# Altium PCB qi_adapter.PcbDoc
Units mil, origin at the board's own origin, x right, y up, seen from the top; angles counter-clockwise.
Board outline 305 x 635 mil, 2 copper layers (Top Layer, Bottom Layer); 21 components, 15 nets, 76 pads, 13 vias.
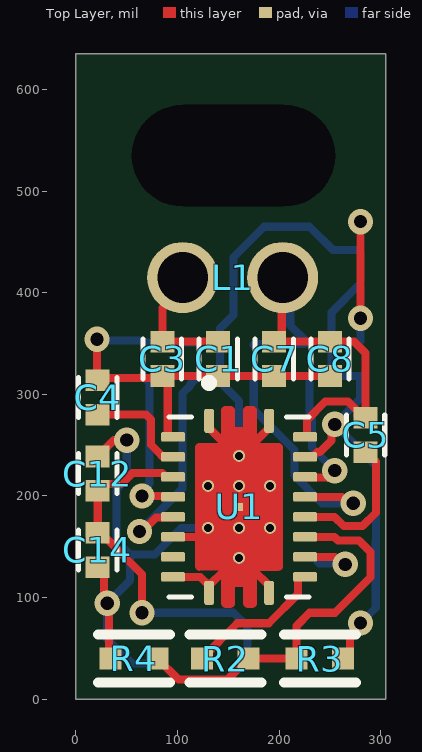
[diagram p0: Top Layer view]
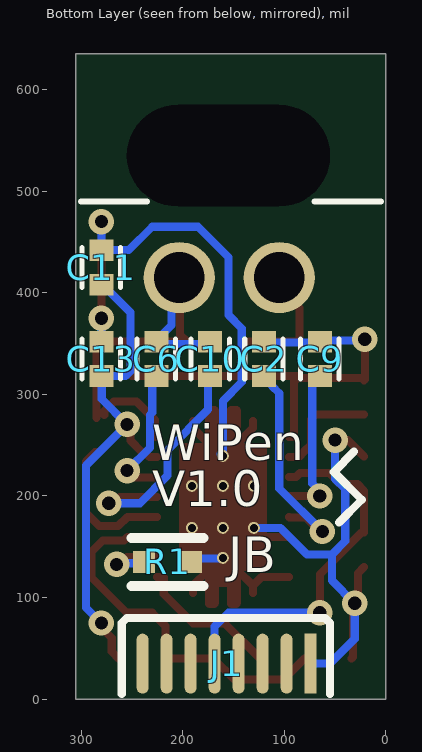
[diagram p1: Bottom Layer view, seen from below]

## Layer stack, top to bottom
Top Solder: solder mask 0.4, Solder Resist, Dk 3.5
Top Layer: signal copper 1.4
Dielectric 1: dielectric 12.6, FR-4, Dk 4.8
Bottom Layer: signal copper 1.4
Bottom Solder: solder mask 0.4, Solder Resist, Dk 3.5

## Board outline
0,0 305,0 305,635 0,635

## Design rules (kind name [scope] priority, off if disabled: settings)
Clearance [All] p1: gap=6 ignorepadtopadclearanceinfootprint=TRUE
MinimumSolderMaskSliver [All] p1: minsoldermaskwidth=6
PolygonConnect [All] p1: connectstyle=Relief reliefconductorwidth=10 reliefentries=4 polygonreliefangle="90 Angle" airgapwidth=10
RoutingVias [All] p1: holewidth=13 width=25 viastyle="Through Hole" minholewidth=13 minwidth=25 maxholewidth=13 maxwidth=25
SilkToSilkClearance [All] p1: silktosilkclearance=6
SilkToSolderMaskClearance [IsPad] p1: minsilkscreentomaskgap=6 clearancetoexposedcopper=TRUE
SolderMaskExpansion [All] p1: expansion=4
Width [All] p1: maxlimit=8 minlimit=8 preferedwidth=8
27 further rules are at their usual default settings.

## Components (designator, comment, footprint, x,y, rotation, side; value= is the part's Value field where it differs from the comment)
C1 "0.22 uF" SMD-0402-CAP 140,335 r270 top
C2 "22 nF" SMD-0402-CAP 120,335 r270 bottom
C3 "22 nF" SMD-0402-CAP 85,335 r270 top
C4 "10 nF" SMD-0402-CAP 21.4,296.93 r270 top
C5 "22 nF" SMD-0402-CAP 285,260 r270 top
C6 "10 nF" SMD-0402-CAP 226,335 r270 bottom
C7 "3300 pF" SMD-0402-CAP 195,335 r90 top
C8 "270 pF" SMD-0402-CAP 250,335 r90 top
C9 "0.47 uF" SMD-0402-CAP 65,335 r270 bottom
C10 "0.47 uF" SMD-0402-CAP 173,335 r270 bottom
C11 "4.7 uF" SMD-0402-CAP 280,425 r270 bottom
C12 "1 uF" SMD-0402-CAP 21.4,221.93 r90 top
C13 "0.1 uF" SMD-0402-CAP 280,335 r270 bottom
C14 "0.1 uF" SMD-0402-CAP 21.4,146.93 r270 top
J1 "Lightning Socket" "LIGHTNING CONNECTOR" 239.49,35 r180 bottom
L1 "Wireless Coil" "QI COIL" 105,415 r0 top
R1 "10k" SMD-0402-RES 215,135 r270 bottom
R2 "270R" SMD-0402-RES 147,40 r90 top
R3 "20k" SMD-0402-RES 240,40 r90 top
R4 "196R" SMD-0402-RES 57,40 r270 top
U1 "BQ51013BRHLT" IC_BQ51013BRHLT 160.47,189.24 r0 top

## Footprints (in the part's own frame and the unit in brackets; to place one, negate y for a bottom-side part, rotate by r counter-clockwise, add the part's x,y. Pads: shape width x height; smd on the part's side, far side on the other; paste and mask are expansions set on the pad)
IC_BQ51013BRHLT [mm]
  rrect40% 0.24x0.6 smd mask+0: 1(-0.75,2.15) 10(-0.75,-2.15) 11(0.75,-2.15) 20(0.75,2.15)
  rrect40% 0.6x0.24 smd mask+0: 2(-1.65,1.75) 3(-1.65,1.25) 4(-1.65,0.75) 5(-1.65,0.25) 6(-1.65,-0.25) 7(-1.65,-0.75) 8(-1.65,-1.25) 9(-1.65,-1.75) 12(1.65,-1.75) 13(1.65,-1.25) 14(1.65,-0.75) 15(1.65,-0.25) 16(1.65,0.25) 17(1.65,0.75) 18(1.65,1.25) 19(1.65,1.75)
  rect 0.2x0.2 smd paste-1 mask+0: 21(0,0)
  round 0.3 hole 0.2 mask+0: 22(0,1.275) 23(-0.775,0.525) 24(0,0.525) 25(0.775,0.525) 26(-0.775,-0.525) 27(0,-0.525) 28(0.775,-0.525) 29(0,-1.275)
  Top Layer region: 381 vertices and 0 holes, not listed, extent -1.095,-2.52 1.095,2.52
  silkscreen extent -1.75,-2.25 1.75,3.2, body extent -1.65,-2.16 1.65,2.16, height 0.25
"LIGHTNING CONNECTOR" [mm]
  rect 0.3x1.5 smd: 1(4.2,0)
  oval 0.3x1.5 smd: 2(3.6,0) 3(3,0) 4(2.4,0) 5(1.8,0) 6(1.2,0) 7(0.6,0) 8(0,0)
"QI COIL" [mil] "Wireless Coil"
  round 70 hole 50: 1(0,0) 2(98.43,0)
  body extent -51,50 149,250, height 50
SMD-0402-CAP [mm]
  rect 0.54x0.6 smd: 1(-0.43,0) 2(0.43,0)
  silkscreen extent -0.5,-0.48 0.5,0.48
SMD-0402-RES [mm]
  rect 0.55x0.55 smd: 1(0,0.584) 2(0,-0.584)
  silkscreen extent -0.6,-0.9 0.6,0.9, body extent -0.27,-0.57 0.28,0.58, height 0.41

## Part data
C1: library part "0.22 uF 0402", "0.22µF ±10% 25V Ceramic Capacitor X5R 0402", Package=0402, Availability=Available, Digikey Part=490-12265-1-ND, Link=https://www.digikey.ca/product-detail/en/murata-electronics/GRT155R61E224KE01D/490-12265-1-ND/5416966, MF="Murata Electronics", MP=GRT155R61E224KE01D, Price=0.16
C2 C3 C5: library part "22nF 0402", "0.022µF -20%, +80% 25V Ceramic Capacitor Y5V (F) 0402", Package=0402, Availability=Available, Digikey Part=311-3823-1-ND, Link=https://www.digikey.ca/product-detail/en/yageo/CC0402ZRY5V8BB223/311-3823-1-ND/8024912, MF=Yageo, MP=CC0402ZRY5V8BB223, Price=0.16
C4 C6: library part "10nF 0402", "10000pF ±10% 25V Ceramic Capacitor X7R 0402", Package=0402, Availability=Available, Digikey Part=399-1278-1-ND, Link=https://www.digikey.ca/product-detail/en/kemet/C0402C103K3RACTU/399-1278-1-ND/416054, MF=KEMET, MP=C0402C103K3RACTU, Price=0.16
C7: library part "3300 pF 0402", "3300pF ±10% 25V Ceramic Capacitor X7R 0402", Package=0402, Availability=Available, Digikey Part=732-7542-1-ND, Link=https://www.digikey.ca/product-detail/en/w%C3%BCrth-elektronik/885012205047/732-7542-1-ND/5454169, MF="Würth Elektronik", MP=885012205047, Price=0.16
C8: library part "270 pF 0402", "270pF ±5% 25V Ceramic Capacitor C0G, NP0 040", Package=0402, Availability=Available, Digikey Part=399-15315-1-ND, Link=https://www.digikey.ca/product-detail/en/kemet/C0402C271J3GAC7867/399-15315-1-ND/7386713, MF=KEMET, MP=C0402C271J3GAC7867, Price=0.16
C9 C10: library part "0.47uF 0402", "0.47µF ±10% 25V Ceramic Capacitor X5R 0402", Package=0402, Availability=Available, Digikey Part=490-12269-1-ND, Link=https://www.digikey.ca/product-detail/en/murata-electronics/GRT155R61E474KE01D/490-12269-1-ND/5416970, MF="Murata Electronics", MP=GRT155R61E474KE01D, Price=0.19
C11: library part "4.7uF 0402", "4.7µF ±20% 16V Ceramic Capacitor X5R 0402", Package=0402, Availability=Available, Digikey Part=478-10788-1-ND, Link=https://www.digikey.ca/product-detail/en/avx-corporation/0402YD475MAT2A/478-10788-1-ND/7536324, MF="AVX Corporation", MP=0402YD475MAT2A, Price=0.52
C12: library part "1uF 0402", "1µF ±10% 16V Ceramic Capacitor X5R 0402", Package=0402, Availability=Available, Digikey Part=1276-1067-1-ND, Link=https://www.digikey.ca/product-detail/en/samsung-electro-mechanics/CL05A105KO5NNNC/1276-1067-1-ND/3889153, MF="Samsung Electro-Mechanics", MP=CL05A105KO5NNNC, Price=0.16
C13 C14: library part "0.1uF 0402", "0.1µF -20%, +80% 16V Ceramic Capacitor Y5V (F) 0402", Package=0402, Availability=Available, Digikey Part=1276-1004-1-ND, Link=https://www.digikey.ca/product-detail/en/samsung-electro-mechanics/CL05F104ZO5NNNC/1276-1004-1-ND/3889090, MF="Samsung Electro-Mechanics", MP=CL05F104ZO5NNNC, Price=0.16
J1: "Female Lightning Socket"
L1: "Qi Compatible Wireless Receiver Coil", ComponentLink1Description="Digikey Link", ComponentLink1URL=https://www.digikey.ca/products/en/inductors-coils-chokes/wireless-charging-coils/75?k=wireless+coil&k=&pkeyword=wireless+coil&sv=0&pv46=15578&sf=1&FV=-8%7C75&quantity=&ColumnSort=0&page=1&pageSize=25
R1: library part "10K 0402", "10 kOhms ±5% 0.063W, 1/16W Chip Resistor 0402 Moisture Resistant Thick Film", Digi-Key Part Number=311-10KJRCT-ND, Manufacturer=Yageo, Package / Case=0402, Part Number=RC0402JR-0710KL, Tolerance=±5%, Link=https://www.digikey.ca/product-detail/en/yageo/RC0402JR-0710KL/311-10KJRCT-ND/729365, Price=0.17, Supplier Device Package=0402
R2: library part "274R 0402", "274 Ohms ±1% 0.1W, 1/10W Chip Resistor 0402", Digi-Key Part Number=P274LCT-ND, Manufacturer="Panasonic Electronic Components", Package / Case=0402, Part Number=ERJ-2RKF2740X, Tolerance=±1%, Link=https://www.digikey.ca/product-detail/en/panasonic-electronic-components/ERJ-2RKF2740X/P274LCT-ND/194305, Price=.16, Supplier Device Package=0402
R3: library part "20K 0402", "20 kOhms ±1% 0.1W, 1/10W Chip Resistor 0402", Digi-Key Part Number=P20.0KLCT-ND, Manufacturer="Panasonic Electronic Components", Package / Case=0402, Part Number=ERJ-2RKF2002X, Tolerance=±1%, Link=https://www.digikey.ca/product-detail/en/panasonic-electronic-components/ERJ-2RKF2002X/P20-0KLCT-ND/194250, Price=.16, Supplier Device Package=0402
R4: library part "196R 0402", "196 Ohms ±1% 0.1W, 1/10W Chip Resistor 0402", Digi-Key Part Number=P196LCT-ND, Manufacturer="Panasonic Electronic Components", Package / Case=0402, Part Number=ERJ-2RKF1960X, Tolerance=±1%, Link=https://www.digikey.ca/product-detail/en/panasonic-electronic-components/ERJ-2RKF1960X/P196LCT-ND/194231, Price=.16, Supplier Device Package=0402
U1: "Wireless Power Receiver PMIC 20-VQFN _3.5x4.5_", Package="VQFN-20 Texas Instruments", Digi-Key_Part_Number=296-35638-1-ND, Digi-Key_Purchase_URL=https://www.digikey.com/product-detail/en/texas-instruments/BQ51013BRHLT/296-35638-1-ND/3877679?utm_source=snapeda&utm_medium=aggregator&utm_campaign=symbol, MF="Texas Instruments", MP=BQ51013BRHLT, SnapEDA_Link=https://www.snapeda.com/parts/BQ51013BRHLT/Texas%20Instruments/view-part/46178/?ref=snap

## Free pads (board coordinates)
  round 60 hole 100 slot 200 at 0 deg unplated: 2(155,535)

## Via types
v1: diameter 25, hole 13, Top Layer to Bottom Layer, tented both sides, 13 vias

## Nets (pads, with @x,y where several pads share a name; then routed paths per layer and width w, separated by ;. In a path a pad name is that pad's centre, name@x,y a point inside that pad or via, vN(x,y) a via of type N, cw(c..) or ccw(c..) an arc to the next point about the centre after c; other vN are vias at no path point)
GND: C11.1 C12.2 C13.1 C14.2 J1.1 R1.1 R4.2 U1.1 U1.7 U1.9 U1.10 U1.11 U1.20 U1.21 U1.22 U1.23 U1.24 U1.25 U1.26 U1.27 U1.28 U1.29 | length 1300.2
  Top Layer w8: C14.2 27.45,123.95 27.45,97.55 v1(30.7,94.3) 32.35,92.65 32.35,41.65 R4.2 ; C12.2 37.54,255 v1(50,255) ; U1.9 122.28,120.34 U1.10@130.94,111.68 ; U1.7 120.07,159.71 128.93,168.57 U1.26 ; U1.10 U1.10@130.94,111.68 ; U1.1 130.94,266.8 145.65,252.09 147.81,252.09 U1.22 161.2,240.16 163.37,240.16 190,266.8 U1.20 ; U1.11 190,111.68 175.3,126.38 173.13,126.38 U1.29 147.81,126.38 145.65,126.38 U1.10@130.94,111.68 ; v1@275,380 v1(280,375) v1(280,470)
  Bottom Layer w8: v1(50,255) 50,216.82 40,206.82 40,155.68 53.18,142.5 ; J1.1 55,35 30.7,59.3 v1(30.7,94.3) 53.18,116.78 53.18,142.5 ; U1.26 103.57,168.57 77.5,142.5 53.18,142.5 ; U1.29 161.2,138.31 188.69,138.31 R1.1 ; U1.22@162.5,241.46 U1.22 160.47,293.4 141.81,312.06 141.81,365 155,378.19 155,435 185,465 230,465 253.07,441.93 C11.1 v1(280,470) ; C13.1 v1(280,375)
NetC1_1: C1.1 C3.1 L1.1 | length 139.1
  Top Layer w8: L1.1@111.57,425 111.57,411.68 85,385.11 C3.1 C1.1
NetC1_2: C1.2 C2.1 C3.2 C4.1 C7.1 C8.1 C9.1 U1.2 | length 439.3
  Top Layer w8: v1(20.7,354.3) 20.7,314.56 C4.1 23.5,315.96 82.89,315.96 C3.2 ; U1.2 90.98,258.13 90.26,258.86 90.26,312.81 C3.2 ; C8.1 C7.1 C1.2 C3.2
  Bottom Layer w8: v1@20.83,354.43 v1(20.7,354.3) 21.88,353.12 63.81,353.12 C9.1 65.96,350.96 119.04,350.96 C2.1@120,350
NetC2_2: C2.2 U1.6 | length 214.6
  Top Layer w8: v1(62.5,165) 65,165 78.67,178.67 94.79,178.67 U1.6
  Bottom Layer w8: v1(62.5,165) 105,207.5 105,301.14 112.19,308.33 112.19,309.51 118.82,316.14 C2.2@120,316.14
NetC4_2: C4.2 U1.3 | length 105.9
  Top Layer w8: C4.2 69.01,280 73.7,275.31 73.7,250.37 80.45,243.63 85.63,238.45 U1.3
NetC5_1: C5.1 C6.1 C7.2 C8.2 C10.1 L1.2 U1.19 | length 444.7
  Top Layer w8: C7.2 C7.2@195.87,351.93 ; L1.2@210,425 202.5,417.5 202.5,358.56 C7.2@195.87,351.93 ; U1.19 226.53,258.13 227.26,258.86 227.26,274.86 245.37,292.97 267.78,292.97 277.19,283.56 C5.1@277.19,279.79 ; C5.1 285,340.74 273.81,351.93 C8.2 C7.2@195.87,351.93
  Bottom Layer w8: C10.1@175,348.86 175.57,349.43 224.43,349.43 226.91,351.91 210.82,368 210.82,414.18 L1.2@210,415 ; C6.1@229.43,349.43 C6.1@230,350
NetC5_2: C5.2 U1.15 | length 143.6
  Top Layer w8: U1.15 254.41,179.39 263.49,170.31 282.13,170.31 295.31,183.49 295.31,233.94 286.18,243.07 C5.2
NetC6_2: C6.2 U1.17 | length 133.8
  Top Layer w8: U1.17 226.16,218.04 247.73,218.04 v1(254.69,225)
  Bottom Layer w8: C6.2@230,316.14 230,281.98 232.19,279.79 232.19,247.5 v1(254.69,225)
NetC9_2: C9.2 U1.5 | length 155.7
  Top Layer w8: v1(65,200) 75,200 75.2,199.8 94.79,199.8 U1.5
  Bottom Layer w8: v1(65,200) 65,204.6 72.5,212.1 72.5,311.44 65.87,318.07 C9.2
NetC10_2: C10.2 U1.16 | length 230.6
  Top Layer w8: U1.16 261.95,199.08 268.21,192.81 v1(272.81,192.81)
  Bottom Layer w8: C10.2@175,315 175,285 215,245 215,220 242.19,192.81 v1(272.81,192.81)
NetC11_2: C11.2 C13.2 R3.2 U1.18 | length 496.9
  Top Layer w8: U1.18 232.52,238.45 237.48,243.41 240.28,243.41 251.44,254.57 251.44,267.22 v1(254.69,270.47) ; R3.2 269.83,46.83 269.83,60.23 280,70.4 v1(280,75)
  Bottom Layer w8: v1(280,75) 295,90 295,155 295.31,155.31 295.31,229.85 v1(254.69,270.47) 279.66,295.44 279.66,317.73 C13.2 256.19,318.07 251.5,322.76 251.5,380.75 278.82,408.07 C11.2
NetC12_1: C12.1 C14.1 J1.5 U1.4 | length 368.2
  Top Layer w8: v1(65,85) 65,122.98 24.12,163.86 C14.1 C12.1 28.03,211.63 44.81,211.63 55.68,222.5 84.69,222.5 88.43,218.76 U1.4
  Bottom Layer w8: v1(65,85) 155,85 168.62,71.38 J1.5
NetR1_2: R1.2 U1.13 | length 71.7
  Top Layer w8: U1.13 254.98,140.02 v1@265,130
  Bottom Layer w8: R1.2 239.17,133.83 263.83,133.83 v1(265,132.66)
NetR2_1: R2.1 U1.12 | length 144.1
  Top Layer w8: R2.1 158.73,74.73 189.71,74.73 218.59,103.61 218.59,119.61 219.32,120.34 U1.12
NetR2_2: R2.2 R3.1 R4.1 U1.14 | length 374.8
  Top Layer w8: R4.1 100.83,19.17 149.17,19.17 R2.2 R3.1 217,72 230,85 255,85 290,120 290,145 278.69,156.31 257.69,156.31 254.3,159.71 U1.14
pads on no net: J1.2 J1.3 J1.4 J1.6 J1.7 J1.8 U1.8

## Silkscreen, mask and mechanical layers (free items; w line width, h text height)
Bottom Overlay:
  lines w6: 5,490 70,490 ; 235,490 300,490
  lines w8: 31.25,243.75 51.25,223.75 23.75,196.25 46.25,173.75 ; 55,5 55,75 60,80 255,80 260,75 260,5
  text "WiPen" at 230,235 h35
  text "V1.0" at 230,190 h35
  text "JB" at 155,125 h35
Mechanical 1:
  the board outline again, w1